# Altium PCB Chronos.PcbDoc (part 3 of 6)
Units mm, origin at the board's own origin, x right, y up, seen from the top; angles counter-clockwise.
Board outline 74.94 x 59.01 mm, 8 copper layers (TOP, L02_GND, L03_SIG, L04_PWR, L05_GND, L06_SIG, L07_GND, BOTTOM), stack 1.624 mm thick; 413 components, 238 nets, 1566 pads, 873 vias.
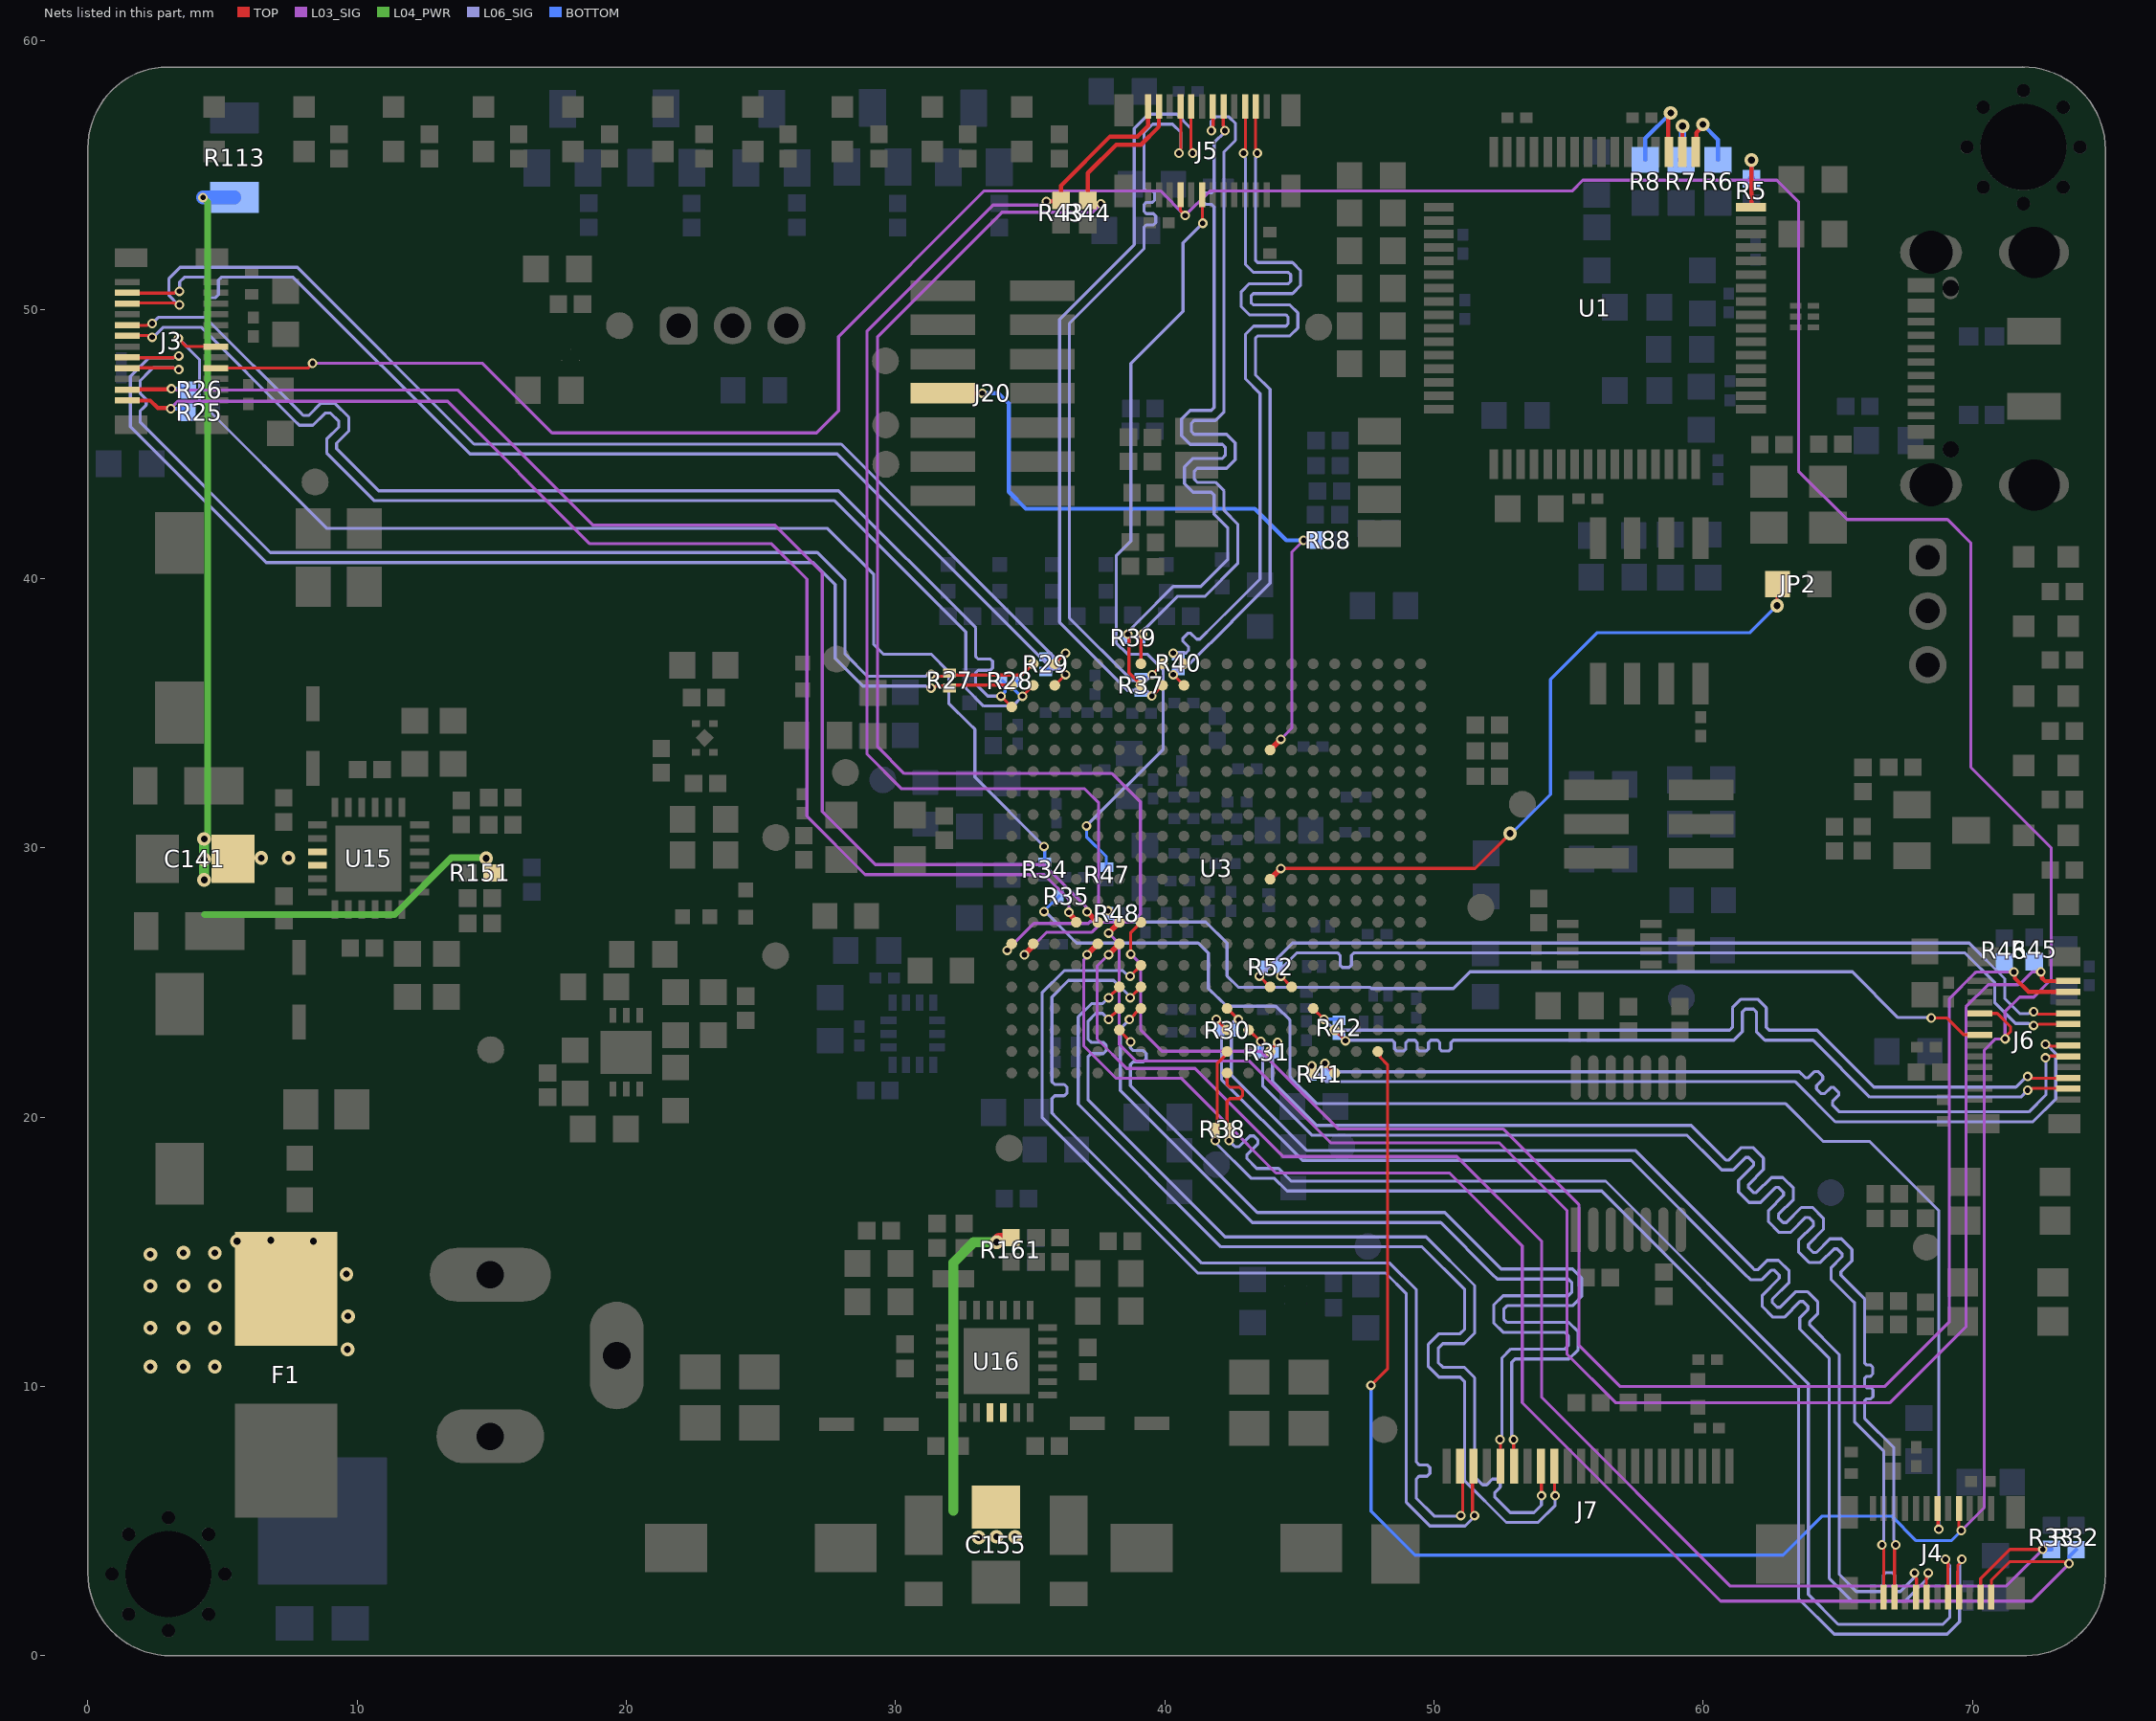
[diagram p8: the nets of this part, all layers, seen from the top]

## Via types
v1: diameter 0.356, hole 0.203, TOP to BOTTOM, tented both sides, 492 vias
v2: diameter 0.508, hole 0.254, TOP to BOTTOM, tented both sides, 380 vias
v3: diameter 0.356, hole 0.203, TOP to BOTTOM, 1 vias

## Nets (pads, with @x,y where several pads share a name; then routed paths per layer and width w, separated by ;. In a path a pad name is that pad's centre, name@x,y a point inside that pad or via, vN(x,y) a via of type N, cw(c..) or ccw(c..) an arc to the next point about the centre after c; other vN are vias at no path point) (continued)
CAM2_1_N: J5.11 R40.2 U3.B9 | length 29.5
  TOP w0.114: v1(40.315,36.44) U3.B9@40.716,36.04 ; J5.11@43.385,57.541 ccw(c43.423,57.503) 43.369,57.503 43.369,56.008 ccw(c43.41,56.008) 43.381,55.98 cw(c43.352,55.951) 43.393,55.951 43.393,55.915 ccw(c43.55,55.915) v1(43.439,55.804)
  L06_SIG w0.114: v1(40.315,36.44) 40.666,36.791 40.881,36.791 42.49,38.4 42.49,38.412 43.913,39.835 43.913,47.032 43.369,47.575 43.369,48.401 43.369,48.931 43.453,49.015 44.649,49.015 44.948,49.315 44.948,49.871 44.649,50.171 43.294,50.171 43.21,50.255 43.21,50.506 43.294,50.59 44.744,50.59 45.044,50.889 45.044,51.446 44.744,51.746 43.453,51.746 43.369,51.829 43.369,51.994 43.369,55.616 43.393,55.64 43.393,55.758 v1(43.439,55.804)
CAM2_1_P: J5.10 R40.1 U3.A9 | length 29.4
  TOP w0.114: v1(40.315,37.24) U3.A9@40.716,36.84 ; v1(42.931,55.804) ccw(c42.82,55.915) 42.977,55.915 42.977,55.951 cw(c43.018,55.951) 42.989,55.98 ccw(c42.96,56.008) 43.001,56.008 43.001,57.503 ccw(c42.947,57.503) J5.10@42.985,57.541
  L06_SIG w0.114: v1(40.315,37.24) 40.785,37.24 40.849,37.304 40.889,37.344 40.889,37.463 40.674,37.678 40.674,37.796 40.852,37.974 40.971,37.974 41.185,37.759 41.304,37.759 41.861,38.316 42.217,38.673 42.23,38.673 43.545,39.988 43.545,46.879 43.001,47.423 43.001,48.401 43.001,49.084 43.3,49.383 44.496,49.383 44.58,49.467 44.58,49.719 44.496,49.803 43.141,49.803 42.841,50.102 42.841,50.659 43.141,50.958 44.592,50.958 44.676,51.042 44.676,51.294 44.592,51.377 43.3,51.377 43.001,51.677 43.001,51.994 43.001,55.616 42.977,55.64 42.977,55.758 v1(42.931,55.804)
CAM2_CLK_N: J5.5 R37.2 U3.B8 | length 30
  TOP w0.114: v1(39.524,35.643) U3.B8@39.924,36.043 ; J5.5@40.985,57.541 ccw(c41.023,57.503) 40.969,57.503 40.969,56.008 ccw(c41.01,56.008) 40.981,55.98 cw(c40.952,55.951) 40.993,55.951 40.993,55.915 ccw(c41.15,55.915) v1(41.039,55.804) cw(c40.901,55.804) v1@40.999,55.706
  L06_SIG w0.114: v1(39.524,35.643) 39.524,35.648 39.318,35.855 38.621,35.855 36.091,38.384 36.091,38.4 36.091,49.636 38.864,52.408 38.864,56.719 39.398,57.253 40.445,57.253 40.969,56.73 40.969,55.991 40.993,55.968 40.993,55.85 v1(41.039,55.804)
CAM2_CLK_P: J5.4 R37.1 U3.A8 | length 29.9
  TOP w0.114: v1(39.535,36.435) U3.A8@39.935,36.835 ; J5.4@40.585,57.541 cw(c40.547,57.503) 40.601,57.503 40.601,56.008 cw(c40.56,56.008) 40.589,55.98 ccw(c40.618,55.951) 40.577,55.951 40.577,55.915 cw(c40.42,55.915) v1(40.531,55.804) 40.54,55.804 ccw(c40.54,55.891) v1@40.601,55.829
  L06_SIG w0.114: v1(39.535,36.435) 39.53,36.435 39.318,36.223 38.774,36.223 36.46,38.537 36.46,49.484 39.232,52.256 39.232,52.581 39.232,53.057 39.316,53.141 39.582,53.141 39.666,53.225 39.666,53.476 39.582,53.56 39.316,53.56 39.232,53.644 39.232,53.895 39.316,53.979 39.54,53.979 39.624,54.063 39.624,54.315 39.54,54.398 39.316,54.398 39.232,54.482 39.232,55.81 39.232,56.567 39.55,56.885 40.293,56.885 40.601,56.577 40.601,55.991 40.577,55.968 40.577,55.85 v1(40.531,55.804)
  BOTTOM w0.114: R37.1@39.115,36.332 39.432,36.332 v1(39.535,36.435)
CAM2_MCLK: J5.19 R47.2 | length 28.9
  TOP w0.114: J5.19@41.385,54.261 41.398,54.248 41.398,53.215 v1(41.411,53.202)
  L06_SIG w0.114: v1(37.093,30.823) 39.945,33.674 39.945,36.6 39.345,37.2 38.617,37.2 38.197,37.62 38.197,38.4 38.197,40.852 38.745,41.4 38.745,48 40.679,49.935 40.679,52.471 v1(41.411,53.202)
  BOTTOM w0.114: v1@37.096,30.82 37.096,30.412 37.83,29.679 37.83,29.308 R47.2@37.845,29.293
CAM2_SCL: J5.2 R44.2 U3.P2 | length 51.5
  TOP w0.152: v1(37.627,53.919) 37.276,53.919 R44.2@37.145,54.05 37.145,55.066 38.197,56.118 39.115,56.118 39.785,56.788 J5.2@39.785,57.541
  TOP w0.203: v1@34.785,26.04 U3.P2@35.145,26.4
  L03_SIG w0.114: v1(34.785,26.035) 35.623,26.873 37.295,26.873 37.669,27.247 38.792,27.247 39.101,27.556 39.101,31.71 38.045,32.766 32.745,32.766 30.323,32.766 29.333,33.756 29.333,48.988 33.958,53.613 37.322,53.613 v1(37.627,53.919)
CAM2_SDA: J5.1 R43.2 U3.P1 | length 48.1
  TOP w0.152: v1(35.604,54.018) 36.113,54.018 R43.2@36.145,54.05 36.145,54.6 37.968,56.423 38.988,56.423 39.385,56.82 J5.1@39.385,57.541
  TOP w0.203: v1(34.145,26.2) U3.P1@34.345,26.4
  L03_SIG w0.114: v1(34.145,26.2) 35.141,27.196 37.16,27.196 37.231,27.268 37.267,27.268 37.479,27.48 37.479,27.765 37.545,27.83 37.545,31.684 37.028,32.2 32.745,32.2 30.226,32.2 28.945,33.481 28.945,49.2 33.625,53.88 35.4,53.88 35.538,54.018 v1(35.604,54.018)
CAM3_0_N: J6.8 R41.2 U3.Y16 | length 32.2
  TOP w0.114: v1(45.95,22) 46.31,21.64 U3.Y16@46.315,21.64 ; v1(72.716,22.206) cw(c72.827,22.095) 72.827,22.252 72.863,22.252 ccw(c72.863,22.293) 72.891,22.264 cw(c72.92,22.235) 72.92,22.276 73.522,22.276 cw(c73.522,22.222) J6.8@73.561,22.26
  L06_SIG w0.114: v1(45.95,22) 45.95,21.935 46.03,21.855 46.03,21.815 46.156,21.689 63.4,21.689 63.576,21.689 63.796,21.469 63.915,21.469 64.147,21.701 64.265,21.701 64.443,21.523 64.443,21.405 64.211,21.173 64.211,21.054 64.389,20.876 64.507,20.876 64.74,21.109 64.858,21.109 65.036,20.931 65.036,20.812 64.804,20.58 64.804,20.462 65.065,20.2 65.216,20.2 72.1,20.2 72.735,20.835 72.735,22.187 v1(72.716,22.206)
CAM3_0_P: J6.7 R41.1 U3.Y15 | length 32.3
  TOP w0.114: v1(45.464,21.91) 45.49,21.884 45.49,21.666 U3.Y15@45.515,21.64 ; v1(72.716,22.714) ccw(c72.827,22.825) 72.827,22.668 72.863,22.668 cw(c72.863,22.627) 72.891,22.656 ccw(c72.92,22.685) 72.92,22.644 73.522,22.644 ccw(c73.522,22.698) J6.7@73.561,22.66
  L06_SIG w0.114: v1(45.464,21.91) 45.464,21.86 46.003,21.321 50.945,21.321 63.424,21.321 64.913,19.832 72.253,19.832 73.103,20.682 73.103,22.366 72.755,22.714 v1(72.716,22.714)
CAM3_1_N: J6.11 R42.2 U3.V16 | length 32.1
  TOP w0.114: U3.V16@46.315,23.24 v1(46.715,22.84) ; v1(72.055,21.006) cw(c72.167,20.895) 72.167,21.052 72.202,21.052 ccw(c72.202,21.093) 72.231,21.064 cw(c72.26,21.035) 72.26,21.076 73.522,21.076 cw(c73.522,21.022) J6.11@73.561,21.06
  L06_SIG w0.114: v1(46.715,22.84) 46.739,22.863 47.979,22.863 48.455,22.863 48.539,22.779 48.539,22.543 48.623,22.459 48.874,22.459 48.958,22.543 48.958,22.779 49.042,22.863 49.293,22.863 49.377,22.779 49.377,22.543 49.461,22.459 49.713,22.459 49.796,22.543 49.796,22.779 49.88,22.863 50.132,22.863 50.215,22.779 50.215,22.543 50.299,22.459 50.551,22.459 50.635,22.543 50.635,22.779 50.718,22.863 50.9,22.863 58.18,22.863 61.139,22.863 61.459,23.183 61.459,23.912 61.563,24.016 61.875,24.016 61.98,23.912 61.98,23.183 62.299,22.863 63.506,22.863 64.081,22.863 66.193,20.751 71.8,20.751 v1(72.055,21.006)
CAM3_1_P: J6.10 R42.1 U3.U15 | length 31.9
  TOP w0.114: U3.U15@45.515,24.04 v1(45.915,23.64) ; v1(72.055,21.514) ccw(c72.167,21.625) 72.167,21.468 72.202,21.468 cw(c72.202,21.427) 72.231,21.456 ccw(c72.26,21.485) 72.26,21.444 73.522,21.444 ccw(c73.522,21.498) J6.10@73.561,21.46
  L06_SIG w0.114: v1(45.915,23.64) 46.324,23.231 58.18,23.231 60.986,23.231 61.091,23.336 61.091,24.065 61.41,24.384 62.028,24.384 62.348,24.065 62.348,23.336 62.452,23.231 63.506,23.231 64.234,23.231 66.346,21.119 71.621,21.119 72.015,21.514 v1(72.055,21.514)
  BOTTOM w0.114: v1(45.915,23.64) 46.472,23.64 R42.1@46.506,23.606
CAM3_CLK_N: J6.5 R52.2 U3.T14 | length 32.6
  TOP w0.114: v1(44.315,25.24) U3.T14@44.716,24.84 ; 72.466,23.46 J6.5@73.561,23.46
  L06_SIG w0.114: v1(44.315,25.24) 44.315,25.514 44.902,26.101 45.957,26.101 46.434,26.101 46.517,26.017 46.517,25.645 46.601,25.561 46.853,25.561 46.936,25.645 46.936,26.017 47.02,26.101 47.945,26.101 50.945,26.101 69.731,26.101 70.838,24.993 70.838,24.25 71.606,23.482 72.091,23.482 72.114,23.458 72.232,23.458 v1(72.278,23.412)
CAM3_CLK_P: J6.4 R52.1 U3.T13 | length 32.5
  TOP w0.114: v1(43.515,25.24) U3.T13@43.915,24.84 ; 72.435,23.828 73.529,23.828 J6.4@73.561,23.86
  L06_SIG w0.114: v1@43.521,25.24 44.75,26.469 45.957,26.469 47.945,26.469 50.945,26.469 69.883,26.469 71.207,25.146 71.207,24.402 71.758,23.85 72.091,23.85 72.114,23.874 72.232,23.874 v1(72.278,23.92)
CAM3_MCLK: J6.19 R48.2 | length 35.6
  TOP w0.114: v1@68.48,23.69 69.055,23.69 69.682,23.063 J6.19@70.278,23.063
  L06_SIG w0.114: v1(37.891,27.664) 37.891,27.612 ccw(c38.005,27.612) 37.924,27.532 38.201,27.254 41.524,27.254 42.312,26.467 42.312,25.248 42.734,24.825 47.642,24.825 47.686,24.782 50.726,24.782 51.345,25.4 65.545,25.4 67.242,23.703 68.457,23.703 v1(68.475,23.685)
CAM3_SCL: J6.2 R46.2 U3.N7 | length 61.1
  TOP w0.114: v1(38.738,26.057) 38.738,26.862 U3.N7@39.115,27.24
  TOP w0.152: v1(71.542,25.392) 71.581,25.353 71.581,25.164 72.085,24.66 J6.2@73.561,24.66
  L03_SIG w0.114: v1(38.738,26.057) 39.111,25.683 39.111,23.241 39.898,22.455 43.557,22.455 46.012,20 46.451,19.561 52.583,19.561 55.384,16.76 55.384,11.537 56.922,10 66.745,10 69.149,12.405 69.149,24.412 70.096,25.359 cw(c70.177,25.278) 70.177,25.392 v1(71.542,25.392)
CAM3_SDA: J6.1 R45.2 U3.N6 | length 62.6
  TOP w0.152: v1(72.545,25.4) 72.583,25.361 72.583,25.175 72.699,25.06 J6.1@73.561,25.06
  TOP w0.203: v1(37.915,26.84) U3.N6@38.316,27.24
  L03_SIG w0.114: v1(37.915,26.84) 38.305,26.45 38.305,22.714 38.926,22.093 43.13,22.093 45.223,20 46.173,19.05 52.427,19.05 54.945,16.532 54.945,11.2 56.745,9.4 66.945,9.4 69.763,12.218 69.763,24.098 70.591,24.927 71.701,24.927 ccw(c71.701,25.041) 71.781,24.96 72.188,25.367 cw(c72.269,25.286) 72.269,25.4 v1(72.545,25.4)
CAM_RESET: J3.21 J4.21 J5.21 J6.21 U3.W18 | length 168.7
  TOP w0.114: J3.21@4.745,47.822 8.167,47.822 v1(8.345,48) ; J5.21@40.585,54.261 40.585,53.667 40.758,53.493 v1(40.758,53.488) ; v1(47.665,10.045) 48.274,10.654 48.274,21.96 48.003,22.231 48.003,22.275 47.915,22.363 U3.W18@47.915,22.44 ; J4.21@69.509,5.464 69.499,5.454 69.499,4.805 69.591,4.713 v1(69.591,4.648) ; J6.21@70.281,23.86 70.926,23.86 71.421,23.366 71.421,23.18 71.217,22.976 v1(71.217,22.911)
  L03_SIG w0.114: v1(8.345,48) 14.657,48 17.242,45.415 23.76,45.415 27.072,45.415 27.885,46.228 27.885,48.997 33.295,54.407 39.84,54.407 v1(40.758,53.488) 41.67,54.4 55.13,54.4 55.53,54.8 62.745,54.8 63.545,54 63.545,44 65.345,42.2 69.078,42.2 69.945,41.333 69.945,33 72.932,30.013 72.932,25.113 72.284,24.464 71.804,24.464 ccw(c71.804,24.35) 71.723,24.431 71.217,23.925 v1(71.217,22.911) 70.861,22.911 70.444,22.494 70.444,5.501 v1(69.591,4.648)
  BOTTOM w0.114: v1(47.665,10.045) 47.665,5.365 49.297,3.734 62.972,3.734 64.425,5.187 67.006,5.187 67.918,4.275 69.218,4.275 v1(69.591,4.648)
CSI_TX_CLK_N: J7.8 U3.U6 | length 37.3
  TOP w0.114: v1(37.913,23.638) U3.U6@38.316,24.04 ; J7.8@53.977,7.036 53.996,7.036 v1(53.996,5.944)
  L06_SIG w0.114: v1(37.913,23.638) 37.697,23.854 37.435,23.854 37.156,23.575 37.156,23.512 37.156,22.889 37.26,22.784 37.721,22.784 37.825,22.68 37.825,22.47 37.721,22.365 37.26,22.365 37.156,22.261 37.156,21.784 37.156,20.641 42.241,15.556 49.71,15.556 51.513,13.753 51.513,13.545 51.513,11.983 51.122,11.592 50.335,11.592 50.159,11.417 50.159,10.891 50.335,10.716 51.122,10.716 51.513,10.325 51.513,8.315 51.513,6.768 51.513,6.649 51.811,6.35 51.959,6.35 52.17,6.561 52.318,6.561 52.467,6.413 52.467,6.265 52.256,6.054 52.256,5.906 52.552,5.609 52.592,5.569 52.84,5.321 53.719,5.321 53.992,5.594 53.992,5.939 v1(53.996,5.944)
CSI_TX_CLK_P: J7.9 U3.T6 | length 37.3
  TOP w0.114: v1(37.914,24.438) U3.T6@38.316,24.84 ; J7.9@54.477,7.036 54.477,5.944 v1(54.504,5.944)
  L06_SIG w0.114: v1@37.913,24.438 37.697,24.222 37.282,24.222 36.787,23.727 36.787,20.489 42.088,15.188 49.557,15.188 51.145,13.6 51.145,13.545 51.145,12.136 50.969,11.96 50.182,11.96 49.791,11.569 49.791,10.739 50.182,10.348 50.969,10.348 51.145,10.172 51.145,8.315 51.145,6.496 52.688,4.953 53.871,4.953 54.504,5.586 v1(54.504,5.944)
CSI_TX_D0_N: J7.2 U3.T7 | length 37.7
  TOP w0.114: v1(38.715,24.44) U3.T7@39.115,24.84 ; v1(50.999,5.207) ccw(c50.999,5.277) 51.068,5.277 J7.2@51.068,6.96
  L06_SIG w0.114: v1(38.715,24.44) 38.715,24.473 38.108,25.079 36.424,25.079 35.809,24.465 35.809,22.23 35.809,21.321 35.914,21.216 36.267,21.216 36.372,21.111 36.372,20.902 36.267,20.797 35.914,20.797 35.809,20.692 35.809,20.216 35.809,20.153 35.962,20 41.378,14.584 48.361,14.584 49.345,13.6 49.345,7.389 49.345,7.195 49.449,7.091 49.748,7.091 49.853,6.986 49.853,6.776 49.748,6.671 49.449,6.671 49.345,6.567 49.345,6.09 49.345,5.849 50.006,5.188 50.98,5.188 v1(50.999,5.207)
CSI_TX_D0_P: J7.3 U3.R7 | length 37.8
  TOP w0.114: v1(38.715,25.24) U3.R7@39.115,25.64 ; J7.3@51.437,6.96 51.437,5.277 ccw(c51.507,5.277) v1(51.507,5.207)
  L06_SIG w0.114: v1(38.715,25.24) 38.65,25.24 38.442,25.448 36.271,25.448 35.441,24.617 35.441,20 41.226,14.215 48.209,14.215 48.976,13.447 48.976,5.697 49.854,4.82 51.159,4.82 51.507,5.167 v1(51.507,5.207)
CSI_TX_D1_N: J7.5 U3.U7 | length 37.3
  TOP w0.114: v1(38.686,23.628) U3.U7@39.086,24.028 ; v1(52.453,8.026) 52.477,8.026 J7.5@52.477,7.036
  L06_SIG w0.114: 38.351,22.998 38.351,20.994 43.254,16.091 50.254,16.091 52.168,14.176 52.351,13.994 54.996,13.994 55.12,13.869 55.12,13.496 54.996,13.372 52.566,13.372 52.225,13.031 52.225,12.353 52.566,12.013 54.863,12.013 54.988,11.888 54.988,11.515 54.863,11.39 52.863,11.39 52.523,11.05 52.523,9.616 52.523,8.026 v1(52.453,8.026) ; 38.351,22.999 38.351,23.294 v1(38.686,23.628)
CSI_TX_D1_P: J7.6 U3.V6 | length 37.3
  TOP w0.114: U3.V6@38.324,23.241 38.324,23.219 38.73,22.813 v1(38.73,22.801) ; v1(52.961,8.026) 52.961,7.036 J7.6@52.977,7.036
  L06_SIG w0.114: v1(38.73,22.801) 38.73,22.835 38.724,22.841 38.724,22.655 38.724,22.582 38.829,22.477 39.205,22.477 39.31,22.372 39.31,22.162 39.205,22.058 38.829,22.058 38.724,21.953 38.724,21.176 39.157,20.743 43.441,16.459 50.406,16.459 52.446,14.419 52.503,14.362 55.148,14.362 55.488,14.022 55.488,13.343 55.148,13.003 52.718,13.003 52.594,12.879 52.594,12.505 52.718,12.381 55.016,12.381 55.356,12.041 55.356,11.362 55.016,11.022 53.015,11.022 52.891,10.898 52.891,9.616 52.891,8.026 v1(52.961,8.026)
CSSPIN: J20.8 R88.1 U3.E13 | length 26.4
  TOP w0.152: J20.8@31.75,46.888 v1(33.221,46.888)
  TOP w0.203: U3.E13@43.915,33.64 v1(44.315,34.04)
  L03_SIG w0.114: v1(44.315,34.04) 44.725,34.449 44.725,38.4 44.725,40.996 v1(45.157,41.427)
  BOTTOM w0.152: v1(33.221,46.888) 33.828,46.888 34.209,46.507 34.209,43.231 34.843,42.596 43.348,42.596 44.517,41.427 v1(45.157,41.427) R88.1@45.646,41.427

## Text inside footprints (layer, text, board x,y; h text height)
C171: PIN_NUMBER "1" at 74.345,24.697 h0.51 r90; PIN_NUMBER "2" at 74.345,25.397 h0.51 r90
D1: PIN_NUMBER "1" at 35.2,57.515 h0.64 r180; PIN_NUMBER "2" at 35.2,55.864 h0.64 r180
D2: PIN_NUMBER "1" at 62.632,50.133 h1.02 r270; PIN_NUMBER "6" at 63.282,50.133 h1.02 r270; PIN_NUMBER "2" at 62.632,49.733 h1.02 r270; PIN_NUMBER "5" at 63.282,49.733 h1.02 r270; PIN_NUMBER "3" at 62.632,49.333 h1.02 r270; PIN_NUMBER "4" at 63.282,49.333 h1.02 r270
D3: PIN_NUMBER "1" at 71.908,41.326 h0.64 r270; PIN_NUMBER "2" at 73.559,41.326 h0.64 r270
D4: PIN_NUMBER "2" at 73.559,38.74 h0.64 r270; PIN_NUMBER "1" at 71.908,38.74 h0.64 r270
D5: PIN_NUMBER "1" at 71.908,36.154 h0.64 r270; PIN_NUMBER "2" at 73.559,36.154 h0.64 r270
D6: PIN_NUMBER "2" at 73.559,33.569 h0.64 r270; PIN_NUMBER "1" at 71.908,33.569 h0.64 r270
D17: PIN_NUMBER "1" at 71.908,28.423 h0.64 r270; PIN_NUMBER "2" at 73.559,28.423 h0.64 r270
D18: PIN_NUMBER "1" at 71.908,30.983 h0.64 r270; PIN_NUMBER "2" at 73.559,30.983 h0.64 r270
D19: PIN_NUMBER "2" at 5.201,55.864 h0.64 r180; PIN_NUMBER "1" at 5.201,57.515 h0.64 r180
D20: PIN_NUMBER "1" at 8.534,57.515 h0.64 r180; PIN_NUMBER "2" at 8.534,55.864 h0.64 r180
D21: PIN_NUMBER "2" at 11.867,55.864 h0.64 r180; PIN_NUMBER "1" at 11.867,57.515 h0.64 r180
D22: PIN_NUMBER "2" at 15.201,55.864 h0.64 r180; PIN_NUMBER "1" at 15.201,57.515 h0.64 r180
D23: PIN_NUMBER "1" at 25.2,57.515 h0.64 r180; PIN_NUMBER "2" at 25.2,55.864 h0.64 r180
D24: PIN_NUMBER "2" at 18.534,55.864 h0.64 r180; PIN_NUMBER "1" at 18.534,57.515 h0.64 r180
D25: PIN_NUMBER "1" at 28.533,57.515 h0.64 r180; PIN_NUMBER "2" at 28.533,55.864 h0.64 r180
D26: PIN_NUMBER "2" at 21.867,55.864 h0.64 r180; PIN_NUMBER "1" at 21.867,57.515 h0.64 r180
D27: PIN_NUMBER "2" at 31.867,55.864 h0.64 r180; PIN_NUMBER "1" at 31.867,57.515 h0.64 r180
D28: PIN_NUMBER "1" at 10.253,1.2 h0.64 r180; PIN_NUMBER "2" at 8.175,1.2 h0.64 r180; PIN_NUMBER "3" at 9.214,5.005 h0.64 r180
D29: PIN_NUMBER "1" at 7.855,32.957 h0.64 r180; PIN_NUMBER "2" at 7.855,35.357 h0.64 r180
D30: PIN_NUMBER "2" at 8.352,23.54 h0.64; PIN_NUMBER "1" at 8.352,25.94 h0.64
D31: PIN_NUMBER "1" at 4.171,32.309 h0.64 r270; PIN_NUMBER "2" at 1.621,32.309 h0.64 r270
D32: PIN_NUMBER "2" at 1.653,26.918 h0.64 r270; PIN_NUMBER "1" at 4.203,26.918 h0.64 r270
D33: PIN_NUMBER "1" at 30.214,8.097 h0.64 r270; PIN_NUMBER "2" at 27.814,8.097 h0.64 r270
D34: PIN_NUMBER "2" at 39.525,9.134 h0.64 r90; PIN_NUMBER "1" at 37.125,9.134 h0.64 r90
D35: PIN_NUMBER "1" at 31.042,4.339 h0.64; PIN_NUMBER "2" at 31.042,1.788 h0.64
D36: PIN_NUMBER "2" at 36.427,1.788 h0.64; PIN_NUMBER "1" at 36.427,4.339 h0.64
F1: PIN_NUMBER "2" at 7.869,13.63 h0.64 r180; PIN_NUMBER "1" at 7.869,7.249 h0.64 r180
FB1: PIN_NUMBER "2" at 60.016,9.228 h0.51 r270; PIN_NUMBER "1" at 60.016,10.228 h0.51 r270
FB5: PIN_NUMBER "1" at 42.348,39.7 h0.51 r270; PIN_NUMBER "2" at 42.348,40.7 h0.51 r270
FB6: PIN_NUMBER "1" at 24.633,28.435 h0.51 r270; PIN_NUMBER "2" at 24.633,27.435 h0.51 r270
FB7: PIN_NUMBER "2" at 26.341,36.875 h0.51 r90; PIN_NUMBER "1" at 26.341,35.875 h0.51 r90
FB8: PIN_NUMBER "1" at 22.094,27.647 h0.51; PIN_NUMBER "2" at 23.094,27.647 h0.51
J39: PIN_NUMBER "1" at 15.757,14.15 h1.02 r270; PIN_NUMBER "3" at 20.051,11.15 h1.02 r270; PIN_NUMBER "2" at 15.351,8.15 h1.02 r270; ASSEMBLY_TOP "1" at 14.223,16.603 h1.6 r270; ASSEMBLY_TOP "3" at 21.103,11.751 h1.6 r270; ASSEMBLY_TOP "2" at 8.504,8.756 h1.6 r270; REV "MFG:CUI" at -6.387,29.901 h1.27 r270; REV "MFG P/N:PJ-002A" at -8.787,29.901 h1.27 r270; PROP "A.C.T" at -3.987,29.901 h1.27 r270; COMP_DIM "SYMBOL NAME:pj_002a_3p" at 34.713,30.701 h1.27 r270; COMP_DIM "PADSTACK(S):1_0x3_5h2_0w4_5o,1_0x3_0h2_0w4_0o" at 32.513,30.601 h1.27 r270; COMP_DIM "COMP HEIGHT:11.0mm" at 30.313,30.601 h1.27 r270
JP1: PIN_NUMBER "2" at 64.676,54.829 h0.51 r180; PIN_NUMBER "1" at 63.076,54.829 h0.51 r180
JP2: PIN_NUMBER "2" at 62.973,39.8 h0.51; PIN_NUMBER "1" at 64.523,39.8 h0.51
L1: PIN_NUMBER "2" at 56.722,50.483 h1.02; PIN_NUMBER "1" at 58.372,50.483 h1.02
L2: PIN_NUMBER "2" at 67.709,44.726 h1.02 r180; PIN_NUMBER "1" at 66.059,44.726 h1.02 r180
L3: PIN_NUMBER "2" at 56.722,47.394 h1.02; PIN_NUMBER "1" at 58.372,47.394 h1.02
L4: PIN_NUMBER "1" at 38.019,39.53 h0.51 r270; PIN_NUMBER "2" at 38.019,40.531 h0.51 r270
L5: PIN_NUMBER "1" at 32.948,35.4 h0.51 r270; PIN_NUMBER "2" at 32.948,36.4 h0.51 r270
L6: PIN_NUMBER "1" at 40.265,39.53 h0.51 r270; PIN_NUMBER "2" at 40.265,40.531 h0.51 r270
L7: PIN_NUMBER "1" at 34.082,39.53 h0.51 r270; PIN_NUMBER "2" at 34.082,40.531 h0.51 r270
L8: PIN_NUMBER "1" at 36.038,39.53 h0.51 r270; PIN_NUMBER "2" at 36.038,40.531 h0.51 r270
L9: PIN_NUMBER "1" at 32.148,39.53 h0.51 r270; PIN_NUMBER "2" at 32.148,40.531 h0.51 r270
L14: PIN_NUMBER "2" at 2.891,35.027 h0.64; PIN_NUMBER "1" at 2.891,41.326 h0.64
L15: PIN_NUMBER "2" at 3.918,24.2 h0.64 r180; PIN_NUMBER "1" at 3.918,17.901 h0.64 r180
L16: PIN_NUMBER "1" at 21.845,3.492 h0.64 r90; PIN_NUMBER "2" at 28.145,3.492 h0.64 r90
L17: PIN_NUMBER "2" at 39.145,4.508 h0.64 r270; PIN_NUMBER "1" at 45.444,4.508 h0.64 r270
Q1: PIN_NUMBER "1" at 67.504,31.608 h0.64 r90; PIN_NUMBER "3" at 69.704,30.658 h0.64 r90; PIN_NUMBER "2" at 67.504,29.708 h0.64 r90
Q2: PIN_NUMBER "2" at 24.448,55.001 h0.64 r180; PIN_NUMBER "3" at 25.398,57.201 h0.64 r180; PIN_NUMBER "1" at 26.348,55.001 h0.64 r180
Q3: PIN_NUMBER "2" at 28.196,55.035 h0.64 r180; PIN_NUMBER "3" at 29.146,57.235 h0.64 r180; PIN_NUMBER "1" at 30.096,55.035 h0.64 r180
Q4: PIN_NUMBER "1" at 18.58,55.001 h0.64 r180; PIN_NUMBER "3" at 17.63,57.201 h0.64 r180; PIN_NUMBER "2" at 16.68,55.001 h0.64 r180
Q5: PIN_NUMBER "2" at 20.53,55.012 h0.64 r180; PIN_NUMBER "3" at 21.48,57.212 h0.64 r180; PIN_NUMBER "1" at 22.43,55.012 h0.64 r180
Q6: PIN_NUMBER "2" at 31.955,55.024 h0.64 r180; PIN_NUMBER "3" at 32.905,57.223 h0.64 r180; PIN_NUMBER "1" at 33.855,55.024 h0.64 r180
R1: PIN_NUMBER "1" at 57.287,29.594 h0.51 r180; PIN_NUMBER "2" at 55.687,29.594 h0.51 r180
R2: PIN_NUMBER "1" at 58.93,32.531 h0.51; PIN_NUMBER "2" at 60.53,32.531 h0.51
R3: PIN_NUMBER "1" at 58.93,30.886 h0.51; PIN_NUMBER "2" at 60.53,30.886 h0.51
R4: PIN_NUMBER "1" at 55.28,32.356 h0.51; PIN_NUMBER "2" at 56.88,32.356 h0.51
R5: PIN_NUMBER "1" at 61.596,54.86 h0.51 r90; PIN_NUMBER "2" at 61.596,53.959 h0.51 r90
R6: PIN_NUMBER "1" at 60.553,55.758 h0.51 r270; PIN_NUMBER "2" at 60.553,54.158 h0.51 r270
R7: PIN_NUMBER "1" at 59.182,55.758 h0.51 r270; PIN_NUMBER "2" at 59.182,54.158 h0.51 r270
R8: PIN_NUMBER "1" at 57.851,55.758 h0.51 r270; PIN_NUMBER "2" at 57.851,54.158 h0.51 r270
R9: PIN_NUMBER "2" at 64.676,52.807 h0.51 r180; PIN_NUMBER "1" at 63.076,52.807 h0.51 r180
R10: PIN_NUMBER "1" at 60.183,39.835 h0.51 r90; PIN_NUMBER "2" at 60.183,41.435 h0.51 r90
R11: PIN_NUMBER "1" at 58.786,39.835 h0.51 r90; PIN_NUMBER "2" at 58.786,41.435 h0.51 r90
R12: PIN_NUMBER "1" at 57.641,40.056 h0.51 r180; PIN_NUMBER "2" at 56.04,40.056 h0.51 r180
R13: PIN_NUMBER "1" at 58.149,48.514 h0.51; PIN_NUMBER "2" at 59.749,48.514 h0.51
R14: PIN_NUMBER "1" at 35.886,55.605 h0.51 r90; PIN_NUMBER "2" at 35.886,56.505 h0.51 r90
R15: PIN_NUMBER "2" at 47.073,52.183 h0.51; PIN_NUMBER "1" at 48.673,52.183 h0.51
R16: PIN_NUMBER "1" at 57.63,41.6 h0.51 r180; PIN_NUMBER "2" at 56.03,41.6 h0.51 r180
R17: PIN_NUMBER "2" at 47.073,50.786 h0.51; PIN_NUMBER "1" at 48.673,50.786 h0.51
R18: PIN_NUMBER "1" at 48.47,47.788 h0.51 r270; PIN_NUMBER "2" at 46.87,47.788 h0.51 r270
R19: PIN_NUMBER "1" at 48.47,54.773 h0.51 r270; PIN_NUMBER "2" at 46.87,54.773 h0.51 r270
R20: PIN_NUMBER "2" at 47.073,53.58 h0.51; PIN_NUMBER "1" at 48.673,53.58 h0.51
R21: PIN_NUMBER "2" at 47.073,49.389 h0.51; PIN_NUMBER "1" at 48.673,49.389 h0.51
R22: PIN_NUMBER "1" at 48.673,49.388 h0.51 r180; PIN_NUMBER "2" at 47.073,49.388 h0.51 r180
R23: PIN_NUMBER "1" at 26.39,29.56 h0.51 r90; PIN_NUMBER "2" at 26.39,30.461 h0.51 r90
R24: PIN_NUMBER "1" at 32.017,31.188 h0.51 r270; PIN_NUMBER "2" at 32.017,30.288 h0.51 r270
R25: PIN_NUMBER "1" at 4.58,46.381 h0.51; PIN_NUMBER "2" at 3.68,46.381 h0.51
R26: PIN_NUMBER "1" at 4.592,47.213 h0.51; PIN_NUMBER "2" at 3.691,47.213 h0.51
R27: PIN_NUMBER "2" at 31.999,35.742 h0.51 r270; PIN_NUMBER "1" at 31.999,36.292 h0.51 r270
R28: PIN_NUMBER "1" at 34.322,36.214 h0.51; PIN_NUMBER "2" at 33.772,36.214 h0.51
R29: PIN_NUMBER "1" at 35.581,36.897 h0.51 r90; PIN_NUMBER "2" at 35.581,36.347 h0.51 r90
R30: PIN_NUMBER "1" at 42.24,23.241 h0.51 r180; PIN_NUMBER "2" at 42.79,23.241 h0.51 r180
R31: PIN_NUMBER "2" at 43.316,22.409 h0.51; PIN_NUMBER "1" at 43.866,22.409 h0.51
R32: PIN_NUMBER "1" at 73.649,4.844 h0.51 r90; PIN_NUMBER "2" at 73.649,3.944 h0.51 r90
R33: PIN_NUMBER "1" at 72.741,4.85 h0.51 r90; PIN_NUMBER "2" at 72.741,3.95 h0.51 r90
R34: PIN_NUMBER "2" at 35.545,29.678 h0.51 r270; PIN_NUMBER "1" at 35.545,29.128 h0.51 r270
R35: PIN_NUMBER "1" at 36.421,28.215 h0.51; PIN_NUMBER "2" at 35.871,28.215 h0.51
R36: PIN_NUMBER "2" at 66.823,7.753 h0.51 r90; PIN_NUMBER "1" at 66.823,6.852 h0.51 r90
R37: PIN_NUMBER "1" at 39.115,36.129 h0.51 r90; PIN_NUMBER "2" at 39.115,35.578 h0.51 r90
R38: PIN_NUMBER "2" at 42.612,19.558 h0.51; PIN_NUMBER "1" at 42.062,19.558 h0.51
R39: PIN_NUMBER "1" at 38.908,37.803 h0.51; PIN_NUMBER "2" at 38.358,37.803 h0.51
R40: PIN_NUMBER "1" at 40.495,36.944 h0.51 r90; PIN_NUMBER "2" at 40.495,36.394 h0.51 r90
R41: PIN_NUMBER "1" at 45.673,21.6 h0.51 r180; PIN_NUMBER "2" at 46.223,21.6 h0.51 r180
R42: PIN_NUMBER "2" at 46.472,22.841 h0.51 r90; PIN_NUMBER "1" at 46.472,23.391 h0.51 r90
R43: PIN_NUMBER "2" at 35.941,54.05 h0.51 r90; PIN_NUMBER "1" at 35.941,53.15 h0.51 r90
R44: PIN_NUMBER "1" at 36.941,53.15 h0.51 r90; PIN_NUMBER "2" at 36.941,54.05 h0.51 r90
R45: PIN_NUMBER "1" at 72.094,26.68 h0.51 r90; PIN_NUMBER "2" at 72.094,25.78 h0.51 r90
R46: PIN_NUMBER "1" at 70.983,26.655 h0.51 r90; PIN_NUMBER "2" at 70.983,25.755 h0.51 r90
R47: PIN_NUMBER "2" at 37.845,29.496 h0.51 r270; PIN_NUMBER "1" at 37.845,28.946 h0.51 r270
R48: PIN_NUMBER "2" at 37.724,27.573 h0.51; PIN_NUMBER "1" at 38.274,27.573 h0.51
R51: PIN_NUMBER "1" at 68.822,21.478 h0.51 r180; PIN_NUMBER "2" at 67.922,21.478 h0.51 r180
R52: PIN_NUMBER "1" at 43.86,25.572 h0.51 r180; PIN_NUMBER "2" at 44.41,25.572 h0.51 r180
R53: PIN_NUMBER "2" at 58.122,9.61 h0.51; PIN_NUMBER "1" at 57.222,9.61 h0.51
R54: PIN_NUMBER "2" at 55.294,9.197 h0.51 r180; PIN_NUMBER "1" at 56.195,9.197 h0.51 r180
R57: PIN_NUMBER "1" at 28.894,20.797 h0.51 r180; PIN_NUMBER "2" at 29.795,20.797 h0.51 r180
R58: PIN_NUMBER "2" at 55.654,13.843 h0.51 r180; PIN_NUMBER "1" at 56.554,13.843 h0.51 r180
R59: PIN_NUMBER "2" at 58.748,13.35 h0.51 r270; PIN_NUMBER "1" at 58.748,14.25 h0.51 r270
R60: PIN_NUMBER "2" at 58.935,24.117 h0.51 r90; PIN_NUMBER "1" at 58.935,23.216 h0.51 r90
R61: PIN_NUMBER "2" at 57.029,24.108 h0.51 r90; PIN_NUMBER "1" at 57.029,23.208 h0.51 r90
R62: PIN_NUMBER "1" at 54.099,27.221 h0.51 r180; PIN_NUMBER "2" at 54.099,28.121 h0.51 r180
R63: PIN_NUMBER "2" at 59.56,25.773 h0.51 r270; PIN_NUMBER "1" at 59.56,26.674 h0.51 r270
R64: PIN_NUMBER "2" at 43.868,28.54 h0.51 r270; PIN_NUMBER "1" at 43.868,27.99 h0.51 r270
R65: PIN_NUMBER "1" at 45.799,27.096 h0.51 r180; PIN_NUMBER "2" at 46.349,27.096 h0.51 r180
R66: PIN_NUMBER "1" at 45.616,25.6 h0.51; PIN_NUMBER "2" at 45.066,25.6 h0.51
R67: PIN_NUMBER "1" at 45.258,24.41 h0.51 r90; PIN_NUMBER "2" at 45.258,23.86 h0.51 r90
R68: PIN_NUMBER "1" at 47.588,23.537 h0.51 r180; PIN_NUMBER "2" at 48.138,23.537 h0.51 r180
R69: PIN_NUMBER "2" at 67.293,17.36 h0.51; PIN_NUMBER "1" at 66.392,17.36 h0.51
R70: PIN_NUMBER "2" at 48.497,24.528 h0.51 r180; PIN_NUMBER "1" at 47.947,24.528 h0.51 r180
R72: PIN_NUMBER "2" at 68.465,16.245 h0.51 r270; PIN_NUMBER "1" at 68.465,17.145 h0.51 r270
R73: PIN_NUMBER "2" at 51.539,33.401 h0.51 r180; PIN_NUMBER "1" at 52.439,33.401 h0.51 r180
R74: PIN_NUMBER "2" at 51.539,32.461 h0.51 r180; PIN_NUMBER "1" at 52.439,32.461 h0.51 r180
R75: PIN_NUMBER "2" at 52.439,34.773 h0.51; PIN_NUMBER "1" at 51.539,34.773 h0.51
R76: PIN_NUMBER "2" at 65.086,29.889 h0.51 r270; PIN_NUMBER "1" at 65.086,30.789 h0.51 r270
R77: PIN_NUMBER "1" at 66.363,13.375 h0.51; PIN_NUMBER "2" at 67.263,13.375 h0.51
R78: PIN_NUMBER "1" at 41.746,34.896 h0.51 r90; PIN_NUMBER "2" at 41.746,33.996 h0.51 r90
R79: PIN_NUMBER "2" at 72.896,28.981 h0.51 r180; PIN_NUMBER "1" at 73.796,28.981 h0.51 r180
R80: PIN_NUMBER "2" at 68.462,12.232 h0.51 r270; PIN_NUMBER "1" at 68.462,13.132 h0.51 r270
R81: PIN_NUMBER "2" at 65.709,30.8 h0.51 r90; PIN_NUMBER "1" at 65.709,29.9 h0.51 r90
R82: PIN_NUMBER "1" at 65.736,32.091 h0.51 r90; PIN_NUMBER "2" at 65.736,32.992 h0.51 r90
R83: PIN_NUMBER "1" at 67.795,32.797 h0.51 r180; PIN_NUMBER "2" at 66.894,32.797 h0.51 r180
R84: PIN_NUMBER "1" at 46.497,42.58 h0.51; PIN_NUMBER "2" at 45.597,42.58 h0.51
R85: PIN_NUMBER "1" at 46.521,45.339 h0.51; PIN_NUMBER "2" at 45.621,45.339 h0.51
R86: PIN_NUMBER "2" at 39.341,45.25 h0.51 r90; PIN_NUMBER "1" at 39.341,44.35 h0.51 r90
R87: PIN_NUMBER "1" at 39.85,43.184 h0.51 r270; PIN_NUMBER "2" at 39.85,42.284 h0.51 r270
R88: PIN_NUMBER "2" at 46.515,41.232 h0.51 r180; PIN_NUMBER "1" at 45.615,41.232 h0.51 r180
R89: PIN_NUMBER "1" at 45.672,43.053 h0.51 r180; PIN_NUMBER "2" at 46.572,43.053 h0.51 r180
R90: PIN_NUMBER "2" at 38.586,43.19 h0.51 r90; PIN_NUMBER "1" at 38.586,42.29 h0.51 r90
R91: PIN_NUMBER "1" at 46.521,44.399 h0.51; PIN_NUMBER "2" at 45.621,44.399 h0.51
R92: PIN_NUMBER "1" at 38.729,45.274 h0.51 r180; PIN_NUMBER "2" at 39.629,45.274 h0.51 r180
R113: PIN_NUMBER "1" at 5.442,57.315 h0.51 r270; PIN_NUMBER "2" at 5.442,54.365 h0.51 r270
R114: PIN_NUMBER "2" at 9.127,56.505 h0.51 r90; PIN_NUMBER "1" at 9.127,55.605 h0.51 r90
R115: PIN_NUMBER "2" at 12.485,56.505 h0.51 r90; PIN_NUMBER "1" at 12.485,55.605 h0.51 r90
R116: PIN_NUMBER "2" at 46.066,12.928 h0.51 r90; PIN_NUMBER "1" at 46.066,13.828 h0.51 r90
R117: PIN_NUMBER "2" at 25.806,56.505 h0.51 r90; PIN_NUMBER "1" at 25.806,55.605 h0.51 r90
R118: PIN_NUMBER "2" at 19.172,56.505 h0.51 r90; PIN_NUMBER "1" at 19.172,55.605 h0.51 r90
R119: PIN_NUMBER "2" at 29.183,56.505 h0.51 r90; PIN_NUMBER "1" at 29.183,55.605 h0.51 r90
R120: PIN_NUMBER "1" at 18.372,49.993 h0.51 r180; PIN_NUMBER "2" at 17.472,49.993 h0.51 r180
R121: PIN_NUMBER "2" at 15.794,56.505 h0.51 r90; PIN_NUMBER "1" at 15.794,55.605 h0.51 r90
R122: PIN_NUMBER "1" at 29.877,53.939 h0.51 r90; PIN_NUMBER "2" at 29.877,53.039 h0.51 r90
R123: PIN_NUMBER "1" at 26.13,53.955 h0.51 r90; PIN_NUMBER "2" at 26.13,53.054 h0.51 r90
R124: PIN_NUMBER "1" at 18.402,53.95 h0.51 r90; PIN_NUMBER "2" at 18.402,53.05 h0.51 r90
R125: PIN_NUMBER "2" at 22.68,56.505 h0.51 r90; PIN_NUMBER "1" at 22.68,55.605 h0.51 r90
R126: PIN_NUMBER "2" at 32.476,56.505 h0.51 r90; PIN_NUMBER "1" at 32.476,55.605 h0.51 r90
R127: PIN_NUMBER "2" at 25.316,47 h0.51; PIN_NUMBER "1" at 23.766,47 h0.51
R128: PIN_NUMBER "2" at 59.405,28.062 h0.51 r180; PIN_NUMBER "1" at 60.955,28.062 h0.51 r180
R129: PIN_NUMBER "2" at 59.373,26.2 h0.51 r180; PIN_NUMBER "1" at 60.923,26.2 h0.51 r180
R130: PIN_NUMBER "2" at 32.266,25.451 h0.51 r180; PIN_NUMBER "1" at 30.716,25.451 h0.51 r180
R131: PIN_NUMBER "1" at 31.11,30.678 h0.51 r90; PIN_NUMBER "2" at 31.11,32.228 h0.51 r90
R132: PIN_NUMBER "1" at 22.218,53.937 h0.51 r90; PIN_NUMBER "2" at 22.218,53.037 h0.51 r90
R133: PIN_NUMBER "1" at 33.65,53.943 h0.51 r90; PIN_NUMBER "2" at 33.65,53.042 h0.51 r90
R134: PIN_NUMBER "1" at 44.774,17.164 h0.51 r90; PIN_NUMBER "2" at 44.774,18.714 h0.51 r90
R135: PIN_NUMBER "1" at 40.545,17.022 h0.51 r90; PIN_NUMBER "2" at 40.545,18.572 h0.51 r90
R136: PIN_NUMBER "2" at 35.373,18.8 h0.51 r180; PIN_NUMBER "1" at 36.923,18.8 h0.51 r180
R137: PIN_NUMBER "1" at 43.545,38.022 h0.51 r90; PIN_NUMBER "2" at 43.545,39.572 h0.51 r90
R138: PIN_NUMBER "2" at 27.577,27.476 h0.51; PIN_NUMBER "1" at 29.127,27.476 h0.51
R140: PIN_NUMBER "2" at 23.395,32.603 h0.51; PIN_NUMBER "1" at 22.494,32.603 h0.51
R141: PIN_NUMBER "2" at 22.428,35.389 h0.51 r180; PIN_NUMBER "1" at 23.328,35.389 h0.51 r180
R142: PIN_NUMBER "1" at 16.868,20.743 h0.51 r90; PIN_NUMBER "2" at 16.868,21.643 h0.51 r90
R143: PIN_NUMBER "1" at 19.829,26.251 h0.51 r90; PIN_NUMBER "2" at 21.43,26.251 h0.51 r90
R144: PIN_NUMBER "1" at 24.633,24.498 h0.51 r270; PIN_NUMBER "2" at 24.633,23.598 h0.51 r270
R145: PIN_NUMBER "2" at 21.093,33.695 h0.51 r90; PIN_NUMBER "1" at 21.093,32.795 h0.51 r90
R146: PIN_NUMBER "1" at 18.092,20.682 h0.51 r270; PIN_NUMBER "2" at 18.092,22.282 h0.51 r270
R147: PIN_NUMBER "1" at 20.185,19.559 h0.51; PIN_NUMBER "2" at 18.585,19.559 h0.51
R148: PIN_NUMBER "2" at 19.63,25.051 h0.51 r90; PIN_NUMBER "1" at 18.029,25.051 h0.51 r90
R149: PIN_NUMBER "2" at 27.714,34.182 h0.51 r180; PIN_NUMBER "1" at 26.114,34.182 h0.51 r180
R150: PIN_NUMBER "1" at 21.883,29.741 h0.51 r180; PIN_NUMBER "2" at 23.484,29.741 h0.51 r180
R151: PIN_NUMBER "1" at 15.011,29.28 h0.51 r270; PIN_NUMBER "2" at 14.111,29.28 h0.51 r270
R153: PIN_NUMBER "2" at 7.869,18.276 h0.51 r270; PIN_NUMBER "1" at 7.869,16.726 h0.51 r270
R154: PIN_NUMBER "1" at 13.773,34.728 h0.51; PIN_NUMBER "2" at 13.773,33.128 h0.51
R155: PIN_NUMBER "1" at 13.113,24.467 h0.51 r180; PIN_NUMBER "2" at 13.113,26.067 h0.51 r180
R156: PIN_NUMBER "1" at 11.945,33.128 h0.51 r180; PIN_NUMBER "2" at 11.945,34.728 h0.51 r180
R157: PIN_NUMBER "1" at 15.787,32.08 h0.51 r270; PIN_NUMBER "2" at 14.887,32.08 h0.51 r270
R158: PIN_NUMBER "2" at 16.694,28.373 h0.51; PIN_NUMBER "1" at 16.694,29.273 h0.51
R159: PIN_NUMBER "1" at 15.011,27.4 h0.51 r270; PIN_NUMBER "2" at 14.111,27.4 h0.51 r270
R160: PIN_NUMBER "2" at 12.072,24.467 h0.51; PIN_NUMBER "1" at 12.072,26.067 h0.51
R161: PIN_NUMBER "1" at 34.083,15.528 h0.51; PIN_NUMBER "2" at 34.083,14.628 h0.51
R164: PIN_NUMBER "1" at 28.584,14.767 h0.51 r90; PIN_NUMBER "2" at 30.184,14.767 h0.51 r90
R165: PIN_NUMBER "1" at 38.745,13.997 h0.51 r270; PIN_NUMBER "2" at 37.144,13.997 h0.51 r270
R166: PIN_NUMBER "1" at 31.341,16.05 h0.51; PIN_NUMBER "2" at 31.341,15.15 h0.51
R167: PIN_NUMBER "2" at 34.94,17.18 h0.51 r90; PIN_NUMBER "1" at 34.04,17.18 h0.51 r90
R168: PIN_NUMBER "1" at 35.912,15.528 h0.51; PIN_NUMBER "2" at 35.912,14.628 h0.51
R169: PIN_NUMBER "1" at 30.184,12.938 h0.51 r270; PIN_NUMBER "2" at 28.584,12.938 h0.51 r270
R170: PIN_NUMBER "1" at 37.145,13.003 h0.51 r90; PIN_NUMBER "2" at 38.745,13.003 h0.51 r90
R172: PIN_NUMBER "1" at 56.057,51.252 h0.51 r90; PIN_NUMBER "2" at 56.057,52.852 h0.51 r90
R173: PIN_NUMBER "1" at 56.052,56.056 h0.51 r270; PIN_NUMBER "2" at 56.052,54.456 h0.51 r270
R174: PIN_NUMBER "2" at 72.896,39.319 h0.51 r180; PIN_NUMBER "1" at 73.796,39.319 h0.51 r180
R175: PIN_NUMBER "2" at 72.896,36.779 h0.51 r180; PIN_NUMBER "1" at 73.796,36.779 h0.51 r180
R176: PIN_NUMBER "2" at 72.896,34.145 h0.51 r180; PIN_NUMBER "1" at 73.796,34.145 h0.51 r180
R177: PIN_NUMBER "2" at 72.896,31.597 h0.51 r180; PIN_NUMBER "1" at 73.796,31.597 h0.51 r180
SW4: PIN_NUMBER "4" at 69.518,17.602 h0.51 r180; PIN_NUMBER "2" at 72.868,17.602 h0.51 r180; PIN_NUMBER "3" at 69.518,16.152 h0.51 r180; PIN_NUMBER "1" at 72.868,16.152 h0.51 r180
SW5: PIN_NUMBER "1" at 72.792,12.419 h0.51 r180; PIN_NUMBER "3" at 69.442,12.419 h0.51 r180; PIN_NUMBER "2" at 72.792,13.868 h0.51 r180; PIN_NUMBER "4" at 69.442,13.868 h0.51 r180
TP1: PIN_NUMBER "1" at 53.285,32.131 h0.64
TP2: PIN_NUMBER "1" at 45.717,49.854 h0.64
TP7: PIN_NUMBER "1" at 68.297,15.684 h0.64
TP9: PIN_NUMBER "1" at 51.745,28.308 h0.64
TP10: PIN_NUMBER "1" at 30.141,45.717 h0.64 r270
TP12: PIN_NUMBER "1" at 30.148,44.247 h0.64 r270
TP_V1P0_LDO: PIN_NUMBER "1" at 27.302,37.017 h0.64 r90
TP_V1P2: PIN_NUMBER "1" at 48.053,15.2 h0.64 r270
TP_V1P8: PIN_NUMBER "1" at 48.145,7.892 h0.64 r180
TP_V1P8_LDO: PIN_NUMBER "1" at 25.545,25.492 h0.64 r180
TP_V2P8: PIN_NUMBER "1" at 19.237,49.399 h0.64 r90
TP_V3P3: PIN_NUMBER "1" at 14.962,23.015 h0.64
TP_V5P0: PIN_NUMBER "1" at 8.437,43.085 h0.64 r180
TP_VCC_CORE_V1P0: PIN_NUMBER "1" at 28.145,33.308 h0.64
TP_VCCIO0: PIN_NUMBER "1" at 29.624,47.583 h0.64 r180
TP_VCCIO1: PIN_NUMBER "1" at 64.745,17.708 h0.64
TP_VCCIO2: PIN_NUMBER "1" at 59.198,24.939 h0.64
TP_VCCIO3: PIN_NUMBER "1" at 46.577,19.418 h0.64
TP_VCCIO4: PIN_NUMBER "1" at 41.924,18.749 h0.64
TP_VCCIO5: PIN_NUMBER "1" at 34.223,19.362 h0.64
TP_VCCIO6: PIN_NUMBER "1" at 26.061,30.393 h0.64 r270
TP_VCCIO7: PIN_NUMBER "1" at 29.021,32.531 h0.64 r90
U1: PIN_NUMBER "24" at 55.819,55.849 h0.51 r180; PIN_NUMBER "7" at 61.573,49.299 h0.51 r180; PIN_NUMBER "8" at 61.573,49.799 h0.51 r180; PIN_NUMBER "38" at 49.769,51.299 h0.51 r180; PIN_NUMBER "40" at 49.769,50.299 h0.51 r180; PIN_NUMBER "50" at 52.319,44.249 h0.51 r180; PIN_NUMBER "42" at 49.769,49.299 h0.51 r180; PIN_NUMBER "56" at 55.319,44.249 h0.51 r180; PIN_NUMBER "31" at 52.319,55.849 h0.51 r180; PIN_NUMBER "20" at 57.819,55.849 h0.51 r180; PIN_NUMBER "45" at 49.769,47.799 h0.51 r180; PIN_NUMBER "43" at 49.769,48.799 h0.51 r180; PIN_NUMBER "46" at 49.769,47.299 h0.51 r180; PIN_NUMBER "41" at 49.769,49.799 h0.51 r180; PIN_NUMBER "44" at 49.769,48.299 h0.51 r180; PIN_NUMBER "26" at 54.819,55.849 h0.51 r180; PIN_NUMBER "39" at 49.769,50.799 h0.51 r180; PIN_NUMBER "3" at 61.573,47.299 h0.51 r180; PIN_NUMBER "14" at 61.369,52.799 h0.51 r180; PIN_NUMBER "4" at 61.573,47.799 h0.51 r180; PIN_NUMBER "2" at 61.573,46.799 h0.51 r180; PIN_NUMBER "6" at 61.573,48.799 h0.51 r180; PIN_NUMBER "19" at 58.319,55.849 h0.51 r180; PIN_NUMBER "63" at 58.819,44.249 h0.51 r180; PIN_NUMBER "17" at 59.319,55.849 h0.51 r180; PIN_NUMBER "62" at 58.319,44.249 h0.51 r180; PIN_NUMBER "16" at 61.369,53.799 h0.51 r180; PIN_NUMBER "49" at 51.819,44.249 h0.51 r180; PIN_NUMBER "64" at 59.319,44.249 h0.51 r180; PIN_NUMBER "37" at 49.769,51.799 h0.51 r180; PIN_NUMBER "12" at 61.369,51.799 h0.51 r180; PIN_NUMBER "9" at 61.573,50.299 h0.51 r180; PIN_NUMBER "18" at 58.819,55.849 h0.51 r180; PIN_NUMBER "61" at 57.819,44.249 h0.51 r180; PIN_NUMBER "47" at 49.769,46.799 h0.51 r180; PIN_NUMBER "1" at 61.573,46.299 h0.51 r180; PIN_NUMBER "25" at 55.319,55.849 h0.51 r180; PIN_NUMBER "11" at 61.369,51.299 h0.51 r180; PIN_NUMBER "15" at 61.369,53.299 h0.51 r180; PIN_NUMBER "13" at 61.369,52.299 h0.51 r180; PIN_NUMBER "5" at 61.573,48.299 h0.51 r180; PIN_NUMBER "10" at 61.369,50.799 h0.51 r180; PIN_NUMBER "35" at 49.769,52.799 h0.51 r180; PIN_NUMBER "51" at 52.819,44.249 h0.51 r180; PIN_NUMBER "36" at 49.769,52.299 h0.51 r180; PIN_NUMBER "60" at 57.319,44.249 h0.51 r180; PIN_NUMBER "59" at 56.819,44.249 h0.51 r180; PIN_NUMBER "58" at 56.319,44.249 h0.51 r180; PIN_NUMBER "57" at 55.819,44.249 h0.51 r180; PIN_NUMBER "55" at 54.819,44.249 h0.51 r180; PIN_NUMBER "54" at 54.319,44.249 h0.51 r180; PIN_NUMBER "53" at 53.819,44.249 h0.51 r180; PIN_NUMBER "52" at 53.319,44.249 h0.51 r180; PIN_NUMBER "48" at 49.769,46.299 h0.51 r180; PIN_NUMBER "23" at 56.319,55.849 h0.51 r180; PIN_NUMBER "22" at 56.819,55.849 h0.51 r180; PIN_NUMBER "21" at 57.319,55.849 h0.51 r180; PIN_NUMBER "34" at 49.769,53.299 h0.51 r180; PIN_NUMBER "33" at 49.769,53.799 h0.51 r180; PIN_NUMBER "32" at 51.819,55.849 h0.51 r180; PIN_NUMBER "30" at 52.819,55.849 h0.51 r180; PIN_NUMBER "29" at 53.319,55.849 h0.51 r180; PIN_NUMBER "28" at 53.819,55.849 h0.51 r180; PIN_NUMBER "27" at 54.319,55.849 h0.51 r180; Top Overlay "64" at 60.397,43.967 h0.41; Top Overlay "16" at 61.362,55.626 h0.41; Top Overlay "32" at 50.516,55.067 h0.41; Top Overlay "48" at 50.643,44.018 h0.41; ASSEMBLY_TOP "16" at 63.463,54.023 h0.51 r180; ASSEMBLY_TOP "17" at 60.155,57.318 h0.51 r180; ASSEMBLY_TOP "32" at 52.573,57.161 h0.51 r180; ASSEMBLY_TOP "33" at 49.142,54.057 h0.51 r180; ASSEMBLY_TOP "48" at 49.439,46.561 h0.51 r180; ASSEMBLY_TOP "49" at 52.546,43.372 h0.51 r180; ASSEMBLY_TOP "64" at 60.072,43.416 h0.51 r180
U2: PIN_NUMBER "4" at 56.093,41.303 h0.51 r270; PIN_NUMBER "6" at 57.363,35.903 h0.51 r270; PIN_NUMBER "8" at 59.903,35.903 h0.51 r270; PIN_NUMBER "1" at 59.903,41.303 h0.51 r270; PIN_NUMBER "2" at 58.633,41.303 h0.51 r270; PIN_NUMBER "3" at 57.363,41.303 h0.51 r270; PIN_NUMBER "5" at 56.093,35.903 h0.51 r270; PIN_NUMBER "7" at 58.633,35.903 h0.51 r270